# Altium PCB nrf21540_qdaa_var1.PcbDoc
Units mm, origin at the board's own origin, x right, y up, seen from the top; angles counter-clockwise.
Board outline 11.5 x 9 mm, 4 copper layers (Top Layer, Mid Layer 1, Mid Layer 2, Bottom Layer), stack 1.583 mm thick; 10 components, 17 nets, 35 pads, 31 vias.
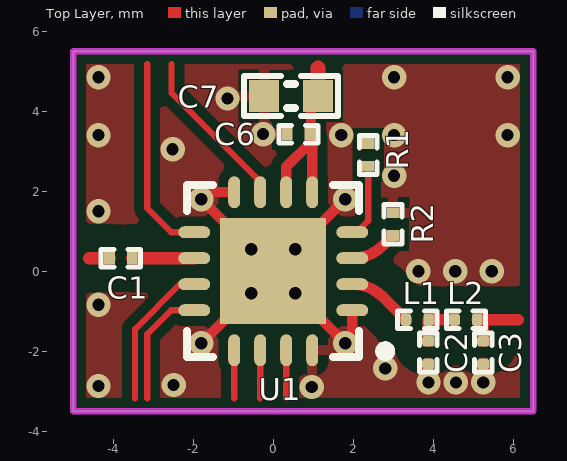
[diagram p0: Top Layer view]
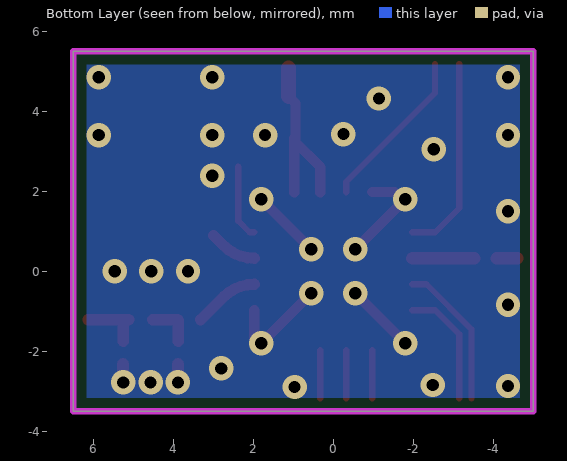
[diagram p1: Bottom Layer view, seen from below]
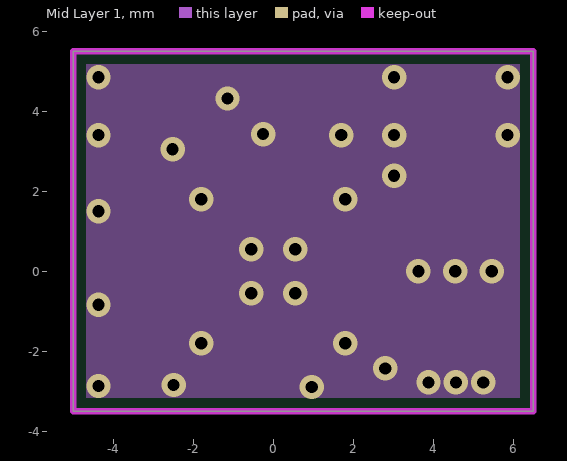
[diagram p2: Mid Layer 1]
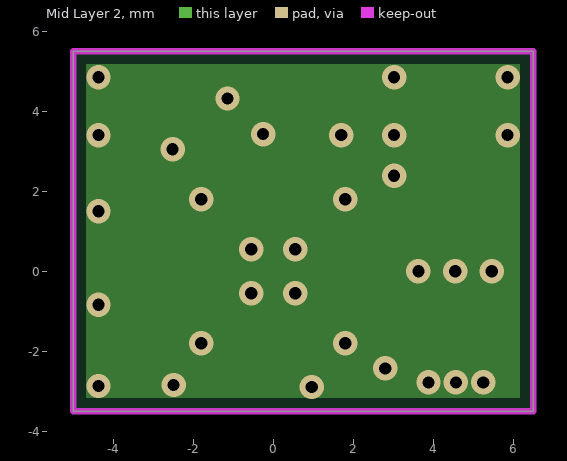
[diagram p3: Mid Layer 2]
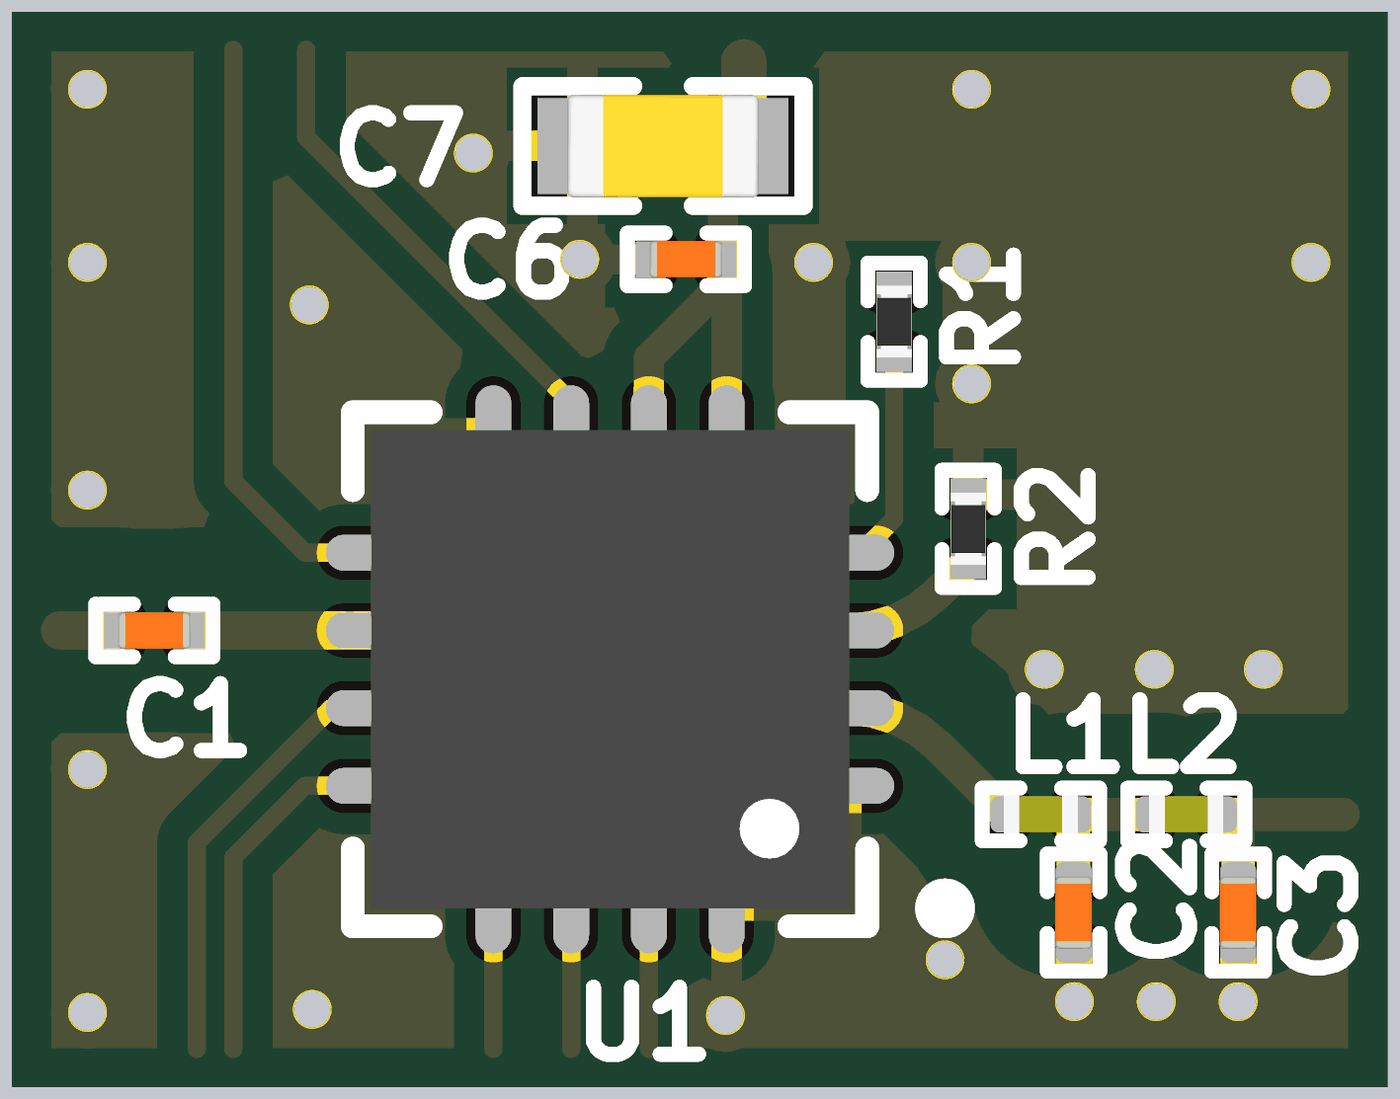
[diagram p4: 3D render of the assembled board from above, using the file's embedded part models]

## Layer stack, top to bottom
Top Solder: solder mask 0.0102, Solder Resist, Dk 3.5
Top Layer: signal copper 0.0356
Dielectric1: core 0.07, FR-4, Dk 4.8
Mid Layer 1: signal copper 0.036
Dielectric 3: prepreg 1.3, Dk 4.2
Mid Layer 2: signal copper 0.036
Dielectric 2: core 0.07, Dk 4.2
Bottom Layer: signal copper 0.0356
Bottom Solder: solder mask 0.0102, Solder Resist, Dk 3.5

## Board outline
-5,-3.5 6.5,-3.5 6.5,5.5 -5,5.5

## Design rules (kind name [scope] priority, off if disabled: settings)
Clearance Polygon_ANT [InPolygon vs InNetClass('ANT')] p1: gap=0.7 ignorepadtopadclearanceinfootprint=FALSE
Clearance Polygon_RF [(InNamedPolygon('Top_Layer-GND')) or  (InNamedPolygon('Mid_Layer_1-GND')) or (InNamedPolygon('Mid_Layer_2-GND')) or (InNamedPolygon('Bottom_Layer-GND')) vs InNet('RF')] p2: gap=0.254 ignorepadtopadclearanceinfootprint=FALSE
Clearance Polygon [(InNamedPolygon('Top_Layer-GND')) or  (InNamedPolygon('Mid_Layer_1-GND')) or (InNamedPolygon('Mid_Layer_2-GND')) or (InNamedPolygon('Bottom_Layer-GND'))] p3: gap=0.254 ignorepadtopadclearanceinfootprint=FALSE except(0: Arc-Hole Track-Hole SMDPad-Hole THPad-Hole Via-Hole Fill-Hole Poly-Hole Region-Hole Text-Hole)
Clearance Clearance_Top [OnLayer('Top Layer')] p4: gap=0.152 ignorepadtopadclearanceinfootprint=FALSE
Clearance [All] p5: gap=0.152 ignorepadtopadclearanceinfootprint=FALSE
ComponentClearance [All] p1 off: gap=0.254 collisioncheckmode=3 verticalgap=0.254 showdistances=FALSE
FabricationTestPointUsage TestPointUsage [All] p1: valid=0 allowmultiple=FALSE
FabricationTestpoint Testpoint [All] p1: side=3 testpointundercomponent=TRUE minsize=1.016 maxsize=2.54 preferedsize=1.524 minholesize=0 maxholesize=1.016 preferedholesize=0.813 testpointgrid=0.025 allowsidetop=TRUE allowsidebottom=TRUE usegrid=TRUE gridtolerance=0
Height [All] p1 off: minheight=0 maxheight=25.4 prefheight=12.7
HoleSize [All] p1: absolutevalues=TRUE maxlimit=4.064 minlimit=0.1 maxpercent=80.000 minpercent=20.000
MinimumAnnularRing [All] p1 off: minimumring=0.152
PolygonConnect PolygonConnect_1 [isVia and innet(gnd)] p1: connectstyle=Direct reliefconductorwidth=0.254 reliefentries=4 polygonreliefangle="90 Angle" airgapwidth=0.254
PolygonConnect [All] p2: connectstyle=Relief reliefconductorwidth=0.254 reliefentries=4 polygonreliefangle="90 Angle" airgapwidth=0.254
RoutingVias [All] p1: holewidth=0.305 width=0.61 viastyle="Through Hole" minholewidth=0.15 minwidth=0.35 maxholewidth=0.305 maxwidth=0.61
SilkToSolderMaskClearance SilkscreenOverComponentPads [IsPad] p1: minsilkscreentomaskgap=0.254 clearancetoexposedcopper=TRUE
SolderMaskExpansion [All] p1: expansion=0.076 istentingtop=FALSE
Width [All] p1: maxlimit=2 minlimit=0.152 preferedwidth=0.152 minimp=50.000000 maximp=50.000000 favimp=50.000000
24 further rules are at their usual default settings.

## Classes and differential pairs
net class ANT: ANT1 ANT2 NetC2_2 NetC4_2 RF_I RF_O1 RF_O2 TRX

## Components (designator, comment, footprint, x,y, rotation, side; value= is the part's Value field where it differs from the comment)
C1 "1.0pF" CAPC0603X03L_C#1 -3.81,0.325 r0 top
C2 "2.0pF" CAPC0603X03L_C#2 3.875,-2.035 r90 top
C3 "1.0pF" CAPC0603X03L_C#3 5.251,-2.035 r90 top
C6 "100nF" CAPC0603X03L_C#1 0.635,3.429 r0 top
C7 "10µF" CAPC1608X06L 0.443,4.377 r0 top
L1 "1.9nH" INDC0603X03L_C 3.601,-1.214 r0 top
L2 "3.0nH" INDC0603X03L_C 4.817,-1.214 r0 top
R1 "33k" RESC0603X03L_C 2.375,2.908 r270 top
R2 "49.9R" RESC0603X03L_C 2.995,1.175 r90 top
U1 "nRF21540-QDAA" QFN65P400X400X65_HS-17N 0,0 r180 top

## Footprints (in the part's own frame and the unit in brackets; to place one, negate y for a bottom-side part, rotate by r counter-clockwise, add the part's x,y. Pads: shape width x height; smd on the part's side, far side on the other; paste and mask are expansions set on the pad)
CAPC0603X03L_C#1 [mm] "Chip Capacitor, 2-Leads, Body 0.6x0.3mm, IPC High Density"
  rect 0.27x0.3 smd: 1(-0.285,0) 2(0.285,0)
  silkscreen extent -0.49,-0.22 0.49,0.22, body extent -0.3,-0.15 0.31,0.15, height 0.3
CAPC0603X03L_C#2 [mm] "Chip Capacitor, 2-Leads, Body 0.6x0.3mm, IPC High Density"
  rrect50% 0.27x0.3 smd: 1(-0.285,0) 2(0.285,0)
  silkscreen extent -0.49,-0.22 0.49,0.22, body extent -0.3,-0.15 0.31,0.15, height 0.3
CAPC0603X03L_C#3 [mm] "Chip Capacitor, 2-Leads, Body 0.6x0.3mm, IPC High Density"
  rrect50% 0.27x0.3 smd mask+0.05: 1(-0.285,0) 2(0.285,0)
  silkscreen extent -0.49,-0.22 0.49,0.22, body extent -0.3,-0.15 0.31,0.15, height 0.3
CAPC1608X06L [mm] "Chip Capacitor, 2-Leads, Body 1.6x0.8mm, IPC High Density"
  rect 0.75x0.8 smd: 1(-0.675,0) 2(0.675,0)
  silkscreen extent -1.17,-0.5 1.17,0.5, body extent -0.8,-0.43 0.8,0.43, height 0.8
INDC0603X03L_C [mm] "Chip Inductor, 2-Leads, Body 0.6x0.3mm, IPC High Density"
  rrect50% 0.27x0.3 smd: 1(-0.285,0) 2(0.285,0)
  silkscreen extent -0.49,-0.22 0.49,0.22, body extent -0.31,-0.16 0.31,0.16, height 0.26
QFN65P400X400X65_HS-17N [mm] "QFN, 16-Leads, Body 4.00x4.00mm, Pitch 0.65mm, Thermal Pad 2.65x2.65mm, IPC Medium Density"
  oval 0.8x0.3 smd: 1(-1.975,0.975) 2(-1.975,0.325) 3(-1.975,-0.325) 4(-1.975,-0.975) 9(1.975,-0.975) 10(1.975,-0.325) 11(1.975,0.325) 12(1.975,0.975)
  oval 0.3x0.8 smd: 5(-0.975,-1.975) 6(-0.325,-1.975) 7(0.325,-1.975) 8(0.975,-1.975) 13(0.975,1.975) 14(0.325,1.975) 15(-0.325,1.975) 16(-0.975,1.975)
  rect 2.65x2.65 smd: 17(0,0)
  silkscreen extent -2.93,-2.15 2.15,2.15, body extent -2,-2 2,2, height 0.65
RESC0603X03L_C [mm] "Chip Resistor, 2-Leads, Body 0.6x0.3mm, IPC High Density"
  rect 0.27x0.3 smd: 1(-0.285,0) 2(0.285,0)
  silkscreen extent -0.49,-0.22 0.49,0.22, body extent -0.3,-0.15 0.3,0.15, height 0.23

## Part data
C1 C3: library part C0201-1.0p, "Capacitor, NP0, ±0.05pF, 50V", Author=rsk, Footprint Doc=0201, Note=50V, Pad Count=2, Part Number=C0201-1.0p
C2: library part C0201-2.0p-HQ-Murata, "Capacitor, NP0, ±0.05pF, 25V", Author=rsk, Footprint Doc=0201, Note=25V, Pad Count=2, Part Number=C0201-2.0p-HQ-Murata
C6: library part C0201-100n, "Capacitor, X5R, ±10%", Author=rsk, Footprint Doc=0201, Note=16V, Pad Count=2, Part Number=C0201-100n
C7: library part C0603-10µ, "Capacitor, X5R, ±20%", Author=rsk, Footprint Doc=0603, Note=6.3V, Pad Count=2, Part Number=C0603-10µ
L1: library part L0201-1n9-HQ-Murata, "Inductor, 600mA, ±0.1ｎH, 120mOhm", Author=rsk, Footprint Doc=0201, Note="-55°C ~ 125°C", Pad Count=2, Part Number=L0201-1n9-HQ-Murata
L2: library part L0201-3n0-HQ-Murata, "Inductor, 600mA, ±0.1ｎH, 120mOhm", Author=rsk, Footprint Doc=0201, Note="-55°C ~ 125°C", Pad Count=2, Part Number=L0201-3n0-HQ-Murata
R1: library part R0201-33k, "Resistor, ±1%, 0.05W", Manufacturer=N.A., Part number IPS=00000001708, Artikkelnr Noca=N.A., Author=rsk, Component Class=Resistors, ComponentLink1Description=Datasheet, ComponentLink1URL=N.A., ComponentLink2Description="Supplier link", ComponentLink2URL=N.A., Footprint Doc=0201, HelpURL=N.A., LatestRevisionDate=2014-11-13, Manufacturer Part Number=N.A., Note="Chip Res 1%", Pad Count=2, Part Number=R0201-33k, Part number Norautron=N.A., PartId=100100073, Published=2014-11-13, Supplier 1=N.A., Supplier 2=N.A., Supplier Part Number 1=N.A., Supplier Part Number 2=N.A.
R2: library part R0201-49R9, "Resistor, ±1%, 0.05W", Author=getr, Footprint Doc=0201, Note="Chip Res 1%", Pad Count=2, Part Number=R0201-49R9
U1: "Radio front-end / range extender for 2.4GHz", Author=rsk, Footprint Doc=QFN-16, Note=N.A., Pad Count=16, Part Number=nRF21540-QDAA

## Via types
v1: diameter 0.61, hole 0.305, Top Layer to Bottom Layer, tented both sides, 31 vias

## Nets (pads, with @x,y where several pads share a name; then routed paths per layer and width w, separated by ;. In a path a pad name is that pad's centre, name@x,y a point inside that pad or via, vN(x,y) a via of type N, cw(c..) or ccw(c..) an arc to the next point about the centre after c; other vN are vias at no path point)
ANT1: L1.1 U1.2 | length 1.7
  Top Layer w0.279: U1.2 cw(c1.975,-1.417) 2.747,-0.645 L1.1
C\S\N\: U1.15 | length 1.2
  Top Layer w0.152: 0.325,-3.175 U1.15
GND: C2.1 C3.1 C6.1 C7.1 R2.2 U1.1 U1.8 U1.16 U1.17 | length 8.4
  Top Layer w0.25: v1(-1.8,1.8) -1.703,1.8 -1.528,1.975 U1.8 ; v1@2.977,2.342 v1(3.023,2.388)
  Top Layer w0.254: v1@-1.586,-1.586 v1(-0.55,-0.55) ; v1@-1.586,1.586 v1(-0.55,0.55) ; v1(0.55,-0.55) v1@1.586,-1.586 ; v1(0.55,0.55) v1@1.586,1.586 ; v1@1.975,-1.657 U1.1
  Top Layer w0.3: C2.1 3.875,-2.773 v1(3.882,-2.78) ; v1@5.251,-2.773 C3.1
  other v1: 0.965,-2.896 -4.369,-2.87 -2.489,-2.845 4.566,-2.78 5.251,-2.78 2.8,-2.43 -1.8,-1.8 1.8,-1.8 -4.369,-0.838 3.63,0 4.55,0 5.461,0 -4.369,1.499 1.8,1.8 -2.515,3.048 -4.369,3.404 1.702,3.404 3.023,3.404 5.859,3.404 -0.254,3.429 -1.143,4.318 -4.369,4.851 3.023,4.851 5.859,4.851
MISO: U1.14 | length 1.2
  Top Layer w0.152: -0.325,-3.175 U1.14
MODE: R1.1
MOSI: U1.13 | length 1.2
  Top Layer w0.152: -0.975,-3.175 U1.13
NetC2_2: C2.2 L1.2 L2.1 | length 1.2
  Top Layer w0.279: C2.2 3.875,-1.225 L1.2 L2.1@4.513,-1.214
NetR1_2: R1.2 U1.4 | length 1.9
  Top Layer w0.152: U1.4 2.093,0.975 2.375,1.257 R1.2
NetR2_1: R2.1 U1.3 | length 1.2
  Top Layer w0.279: U1.3 ccw(c1.975,1.417) 2.747,0.645 R2.1@2.993,0.891
P\D\N\: U1.11 | length 3.7
  Top Layer w0.152: -3.454,-3.175 -3.454,-1.448 -2.332,-0.325 U1.11
RF_I: C1.1 | length 0.5
  Top Layer w0.32: -4.597,0.325 C1.1
RF_O1: C3.2 L2.2 | length 1.6
  Top Layer w0.279: L2.2 5.251,-1.214 ; C3.2 5.251,-1.214 ; 6.127,-1.214 5.251,-1.214
RX_EN: U1.7 | length 4.1
  Top Layer w0.152: -2.54,5.182 -2.54,4.451 -0.325,2.236 U1.7
SCK: U1.12 | length 3
  Top Layer w0.152: -3.15,-3.175 -3.15,-1.574 -2.551,-0.975 U1.12
TRX: C1.2 U1.10 | length 1.5
  Top Layer w0.32: C1.2 U1.10
TX_EN: U1.9 | length 5
  Top Layer w0.152: -3.15,5.182 -3.15,1.574 -2.551,0.975 U1.9
VDD_NRF: C6.2 C7.2 U1.5 U1.6 | length 4.8
  Top Layer w0.254: U1.6 0.325,2.608 0.943,3.226 C6.2@0.943,3.361 ; U1.5 0.975,3.329 C6.2@0.943,3.361 ; C7.2 0.943,4.202 C6.2@0.943,3.361
  Top Layer w0.381: C7.2 1.118,5.08

## Polygon pours and split planes (outlines as drawn)
GND on Bottom Layer "Bottom_Layer-GND" (solid, remove dead copper, pour order 1001): -28.248,10.436 -28.248,-11.564 7.752,-11.564 7.752,10.436
GND on Mid Layer 1 "Mid_Layer_1-GND" (solid, remove dead copper, pour order 1004): -28.248,10.436 -28.248,-11.564 7.752,-11.564 7.752,10.436
GND on Mid Layer 2 "Mid_Layer_2-GND" (solid, remove dead copper, pour order 1002): -28.248,10.436 -28.248,-11.564 7.752,-11.564 7.752,10.436
GND on Top Layer "Top_Layer-GND" (solid, remove dead copper, pour order 1000): -28.248,10.436 -28.248,-11.564 7.752,-11.564 7.752,10.436

## Keep-outs
Keep-Out Layer:
  the board outline again, w0.152

## Silkscreen, mask and mechanical layers (free items; w line width, h text height)
Mechanical 1:
  the board outline again, w0.152

## Dimensions
6.5,-3.5 to 6.5,5.5 on Mechanical 3
6.5,-3.5 to -5,-3.5 on Mechanical 3